# Altium PCB MotorBoard.PcbDoc (part 3 of 3)
Units mm, origin at the board's own origin, x right, y up, seen from the top; angles counter-clockwise.
Board outline 65.2 x 61.84 mm, 4 copper layers (Top Layer, Layer 1, Layer 2, Bottom Layer), stack 1.57 mm thick; 121 components, 73 nets, 432 pads, 165 vias.
Unrouted connection lines stored in the file: 1.
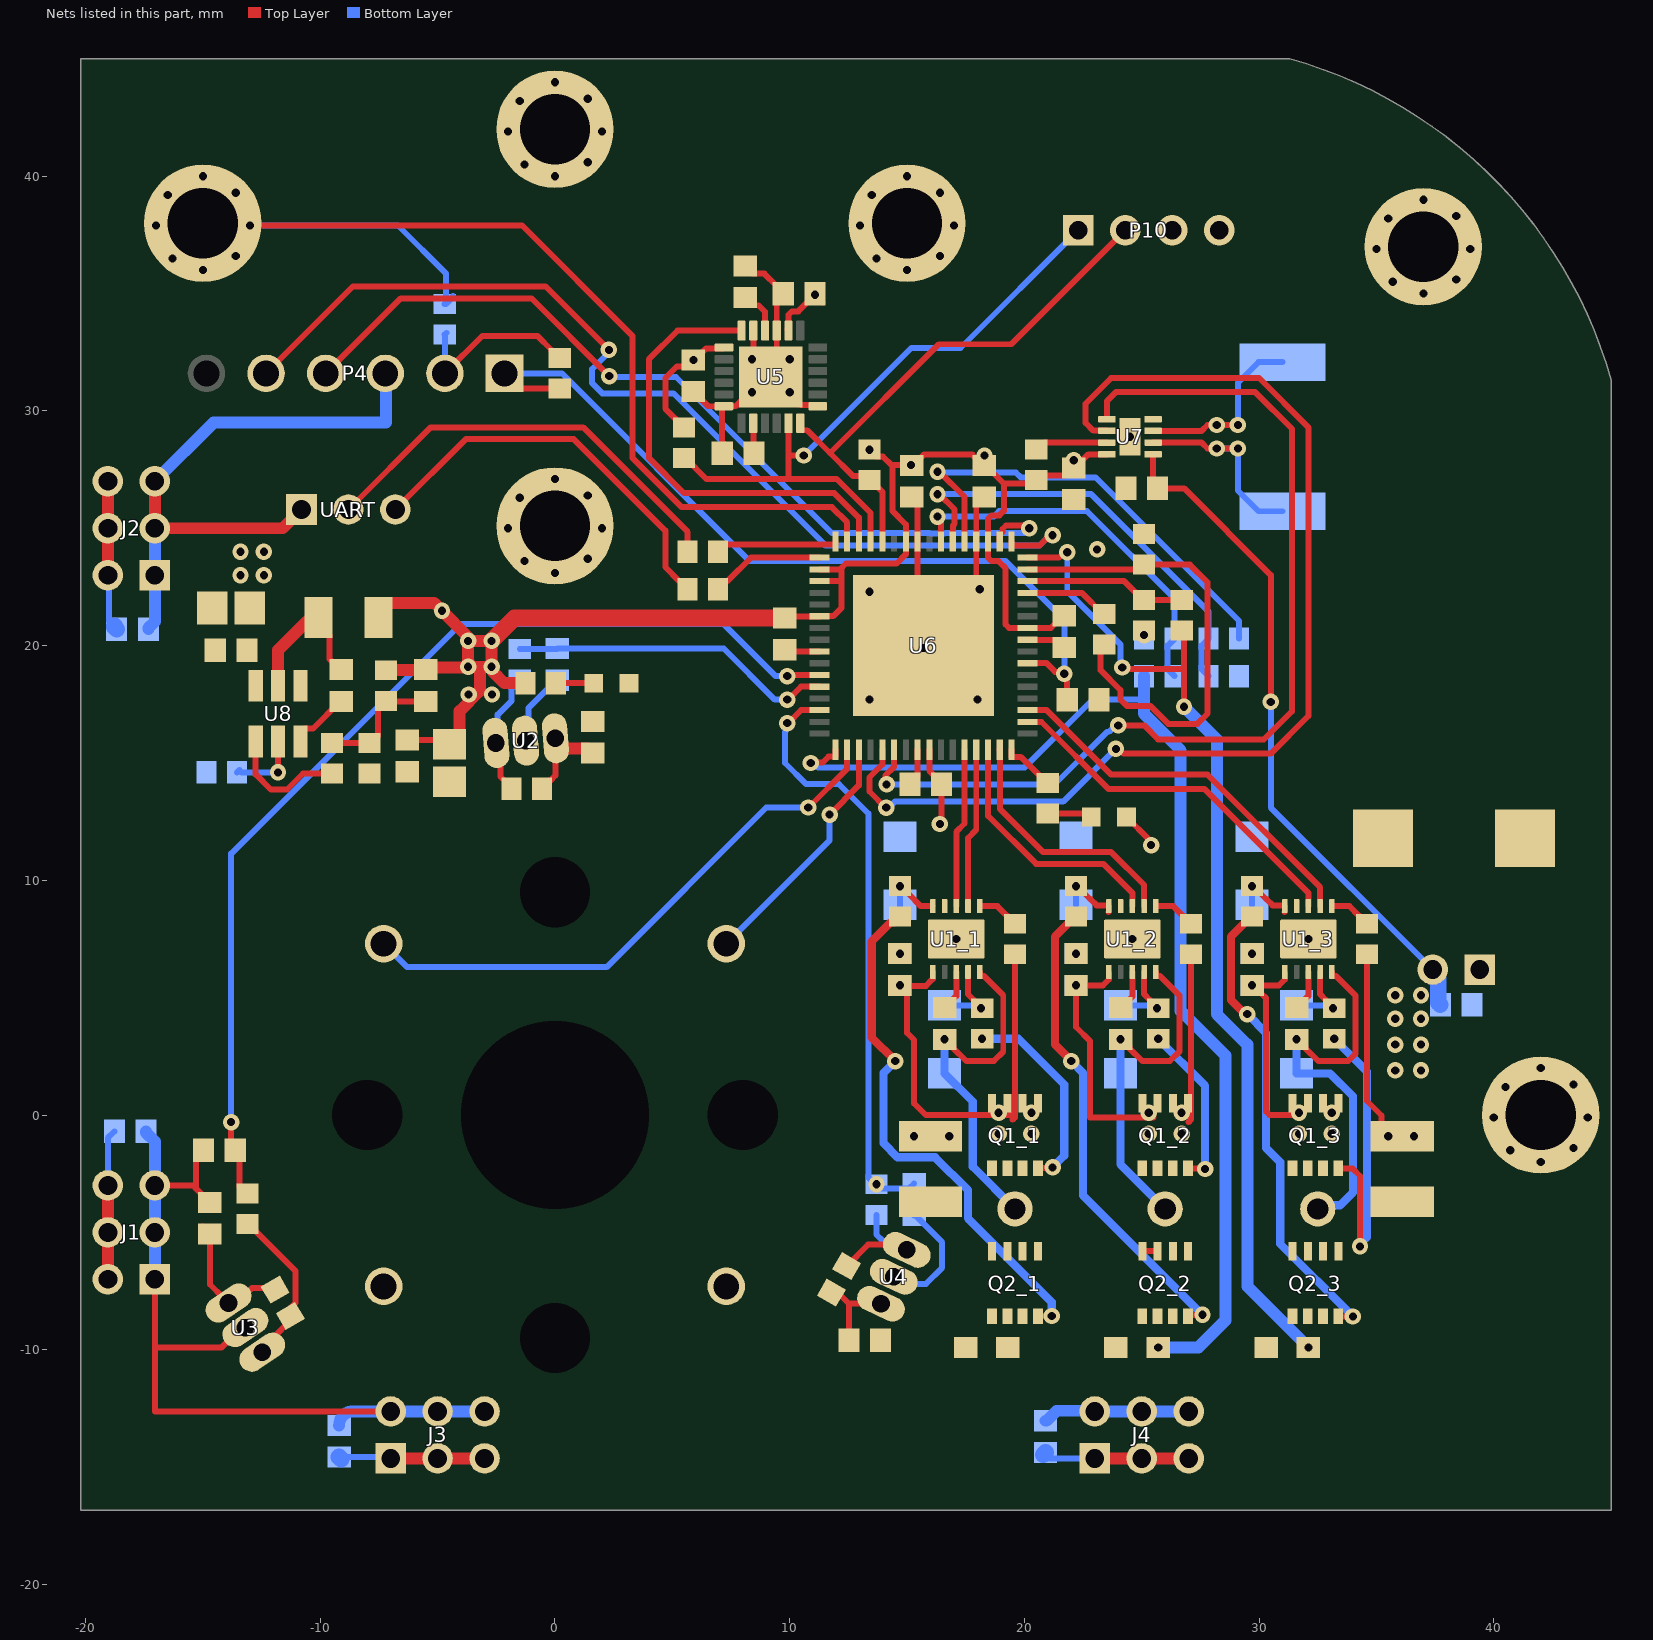
[diagram p4: the nets of this part, all layers, seen from the top]

## Via types
v1: diameter 0.7, hole 0.35, Top Layer to Bottom Layer, tented both sides, 96 vias
v2: diameter 0.7, hole 0.35, Top Layer to Bottom Layer, tented bottom, 66 vias
v3: diameter 0.7, hole 0.35, Top Layer to Bottom Layer, 3 vias

## Nets (pads, with @x,y where several pads share a name; then routed paths per layer and width w, separated by ;. In a path a pad name is that pad's centre, name@x,y a point inside that pad or via, vN(x,y) a via of type N, cw(c..) or ccw(c..) an arc to the next point about the centre after c; other vN are vias at no path point)
3V3: C3.1 C4.1 C5.1 C7.2 C8.2 C9.2 C20.1 C21.1 C22.1 C23.1 C24.1 C27.2 C31.2 C32.2 L1.2 P4.2 P8.1 P10.4 R4.2 R5.1 R6.1 R10.1 R11.2 R15.2 R16.2 R18.2 R22.2 R23.2 U2.1 U3.1 U4.1 U5.8 U5.13 U6.10 U6.19 U6.26 U6.34 U6.35 U6.38 U6.57 U7.8 | length 102.2
  Top Layer w0.254: C4.1@-15.024,-4.751 C4.1@-14.7,-5.075 ; C4.1@-14.65,-5.075 C4.1@-14.7,-5.075 ; U3.1@-14.155,-7.763 -14.7,-7.218 C4.1@-14.7,-5.075 ; U3.1@-13.908,-8.01 -13.549,-8.01 -12.917,-7.378 -11.984,-7.378 R5.1@-11.925,-7.437 ; C8.2@-6.3,15.975 -4.675,15.975 C9.2@-4.5,15.8 ; P4.2@-4.69,31.6 -3.09,33.2 -0.75,33.2 -0.148,32.598 -0.148,32.548 0.15,32.25 R11.2@0.2,32.25 ; R4.2@-0.55,13.9 -0.55,13.95 -0.252,14.248 -0.202,14.248 0.016,14.466 U2.1@0.016,16.05 ; R23.2@5.5,29.3 5.45,29.3 5.152,29.598 5.152,29.648 4.7,30.1 4.7,31.4 5.197,31.897 5.622,31.897 v1(5.9,32.175) 5.95,32.175 6.427,32.652 7.152,32.652 U5.13@7.2,32.7 ; C23.1@9.8,21.175 9.775,21.175 9.85,21.25 U6.38@11.265,21.25 11.268,21.253 11.853,21.253 12.2,21.6 12.2,22.8 ; U5.8@9.9,33.475 U5.8@9.95,33.425 9.95,34.097 10.099,34.246 10.371,34.246 v1(11.075,34.95) ; C32.2@11.075,35 v1(11.075,34.95) ; U6.35@11.265,22.75 12.15,22.75 12.2,22.8 ; U6.34@11.265,23.25 12.15,23.25 ; C32.2@11.398,34.627 v1(11.075,34.95) ; R6.1@11.775,-7.563 12.049,-7.563 12.525,-8.039 ; C5.1@12.525,-9.6 12.525,-8.039 ; v1(13.4,28.35) 13.698,28.052 13.975,28.052 14.327,27.7 v1(15.175,27.7) ; U4.1@13.892,-8.039 12.525,-8.039 ; 14.373,27.654 14.373,25.74 14.95,25.163 U6.26@14.95,24.435 14.947,24.432 14.947,23.886 14.561,23.5 12.4,23.5 12.15,23.25 ; C22.1@15.25,27.675 15.714,28.139 16.8,28.139 17.786,28.139 18.25,27.675 C20.1@18.3,27.675 ; U6.57@15.95,15.565 15.95,14.675 16.475,14.15 C24.1@16.475,14.1 16.475,12.4 v1(16.4,12.4) ; v1(18.3,28.1) C20.1@18.3,27.675 ; C20.1@18.35,27.675 C20.1@18.3,27.675 ; C21.1@21.7,21.275 21.65,21.275 21.125,20.75 U6.10@20.135,20.75 19.349,20.75 19.2,20.899 19.2,23.3 18.9,23.6 18.6,23.6 18.45,23.75 U6.19@18.45,24.435 18.45,25.399 18.599,25.548 18.935,25.548 19.127,25.74 19.127,26.91 ; v1(22.1,27.9) C27.2@22.1,27.575 ; U7.8@23.515,28.15 22.725,28.15 22.15,27.575 C27.2@22.1,27.575 ; P10.4@28.3,37.625 P10.4@28.3,37.7 ; 12.15,23.25 12.2,23.2 12.2,22.8 ; v1(15.175,27.7) 15.175,27.675 C22.1@15.2,27.675 v1(15.175,27.7) ; C20.1@18.3,27.675 18.623,27.352 18.685,27.352 19.127,26.91 ; 19.127,26.91 20.36,26.91 R15.2@20.5,27.05 20.702,27.252 21.727,27.252 22.05,27.575 C27.2@22.1,27.575
  Top Layer w0.508: L1.2@-7.525,21.2 -7.525,21.475 -7.179,21.821 -5.15,21.821 v1(-4.815,21.485) -3.737,20.407 -3.737,20.237 v1(-3.7,20.2) ; R18.2@-7.2,18.95 -7.188,18.962 -5.513,18.962 C7.2@-5.5,18.975 -5.412,19.063 -3.737,19.063 v1(-3.7,19.1) -3.2,19.1 ; C9.2@-4.5,15.8 -4.459,15.8 -4.063,16.196 -4.063,17.212 -3.2,18.075 -3.2,19.1 ; v1@-3.689,19.337 -3.7,19.337 v1(-3.7,20.2) ; R10.1@-1.25,18.4 -2.156,18.4 -2.663,18.907 -2.663,19.063 v1(-2.7,19.1) ; v1(-3.7,20.2) v1(-2.7,20.2) v1(-2.7,19.1) ; -3.2,19.1 v1(-2.7,19.1)
  Top Layer w0.512: U2.1@0.016,16.05 0.016,15.919 0.316,15.619 1.406,15.619 C3.1@1.6,15.425 ; C24.1@16.331,13.956 C24.1@16.475,14.1
  Top Layer w0.708: v1(-2.7,20.2) -1.725,21.175 C23.1@9.775,21.175
  Bottom Layer w0.254: P4.2@-4.815,31.475 P4.2@-4.69,31.6 -4.69,33.24 R16.2@-4.7,33.25 R16.2@-4.619,33.331
  other v1: -3.682,17.918 -2.682,17.918
A: P6.1 U6.51 | length 10.6
  Top Layer w0.254: v1(11.7,12.8) 12.95,14.05 U6.51@12.95,15.565
  Bottom Layer w0.254: P6.1@7.3,7.3 11.7,11.7 v1(11.7,12.8)
B: P9.1 U6.50 | length 24.5
  Top Layer w0.254: v1(10.795,13.102) 10.802,13.102 12.45,14.75 U6.50@12.45,15.565
  Bottom Layer w0.254: P9.1@-7.3,7.3 -6.3,6.3 2.2,6.3 9.002,13.102 v1(10.795,13.102)
BRAKE_SWITCH: pad.1@-15,38 R16.1 U6.31 | length 46.4
  Top Layer w0.254: pad.1@-13.123,38 -13.023,37.9 v2(-13,37.9) -8.3,37.9 -1.4,37.9 3.3,33.2 3.3,28 5.4,25.9 11.8,25.9 12.447,25.253 12.447,24.438 U6.31@12.45,24.435
  Bottom Layer w0.254: pad.1@-13.123,38 -13.023,37.9 -8.3,37.9 -6.686,37.9 -4.65,35.864 -4.65,34.55 -4.352,34.848 -4.352,34.898 R16.1@-4.7,34.55
  other v2: -15,36 -16.3,36.5 -13.6,36.6 -17,37.9 -16.5,39.2 -13.6,39.3 -15,40
Bridge_Out1: C2_1.1 D3_1.1 P1.1 Q1_1.1 Q1_1.2 Q1_1.3 Q2_1.5 Q2_1.6 Q2_1.7 Q2_1.8 U1_1.5 | length 15.5
  Top Layer w0.254: v1(16.6,3.225) 16.65,3.225 16.973,2.902 16.973,2.852 17.525,2.3 18.7,2.3 19.1,2.7 19.1,5.1 18.273,5.927 18.107,5.927 18.1,5.934 U1_1.5@18.1,6.1
  Bottom Layer w0.35: v1(16.6,3.225) D3_1.1@16.6,1.775 17.8,0.575 17.8,-2.2 P1.1@19.6,-4
Bridge_Out2: C2_2.1 D3_2.1 P2.1 Q1_2.1 Q1_2.2 Q1_2.3 Q2_2.5 Q2_2.6 Q2_2.7 Q2_2.8 U1_2.5 | length 15.7
  Top Layer w0.254: v1(24.1,3.225) 24.15,3.225 24.473,2.902 24.473,2.852 25.025,2.3 26.2,2.3 26.6,2.7 26.6,5.1 25.773,5.927 25.607,5.927 25.6,5.934 U1_2.5@25.6,6.1 ; Q2_2.8@25.025,-5.8 Q2_2.7@25.675,-5.8
  Bottom Layer w0.35: v1(24.1,3.225) 24.1,-2.1 P2.1@26,-4
Bridge_Out3: C2_3.1 D3_3.1 P3.1 Q1_3.1 Q1_3.2 Q1_3.3 Q2_3.5 Q2_3.6 Q2_3.7 Q2_3.8 U1_3.5 | length 17.1
  Top Layer w0.254: v1(31.6,3.225) 31.65,3.225 31.973,2.902 31.973,2.852 32.525,2.3 33.8,2.3 34.1,2.6 34.1,5.1 33.273,5.927 33.107,5.927 33.1,5.934 U1_3.5@33.1,6.1
  Bottom Layer w0.35: D3_3.1@31.6,1.775 33.025,1.775 34,0.8 34,-3.3 33.452,-3.848 32.652,-3.848 P3.1@32.5,-4 ; D3_3.1@31.6,1.9 v1(31.6,3.225)
DEBUG_LED: R28.1 U6.64 | length 2.3
  Top Layer w0.254: U6.64@19.45,15.565 19.45,15.265 19.453,15.262 19.838,15.262 20.95,14.15 R28.1@21,14.15
GND: C1_1.1 C1_2.1 C1_3.1 C3.2 C4.2 C5.2 C8.1 C9.1 C10.1 C11.1 C12.1 C13.1 C14.2 C15.2 C16.2 C17_1.1 C17_2.1 C17_3.1 C18.1 C20.2 C21.2 C22.2 C23.2 C24.2 C25.2 C26.2 C27.1 C28.2 C29.1 C30.2 C31.1 C32.1 C33.2 C34.2 C35.1 C36.1 D1.2 D2.2 D4_1.1 D4_2.1 D4_3.1 J1.1 J1.3 J1.5 J2.1 J2.3 J2.5 J3.2 J3.4 J3.6 J4.2 J4.4 J4.6 P4.3 P5.1 P7.1 P10.3 pad.1@0,25.1 pad.1@0,42 pad.1@15,38 pad.1@37,37 pad.1@42,0 R7_1.1 R7_2.1 R7_3.1 R8.1 R21.1 R27.1 R33.1 R35.1 U1_1.9 U1_1.11 U1_2.9 U1_2.11 U1_3.9 U1_3.11 U2.2 U3.2 U4.2 U5.1 U5.9 U5.11 U5.18 U5.25 U6.9 U6.20 U6.25 U6.41 U6.56 U6.65 U7.4 U7.9 U8.1 UART.1 | length 119.5
  Top Layer w0.254: J1.1@-17.05,-7 -17.05,-9.9 ; J1.5@-17.05,-3 -17.048,-3.002 -15.423,-3.002 -15.298,-3.127 ; C35.1@-14.975,-1.5 -15.298,-1.823 -15.298,-3.127 ; C4.2@-14.7,-3.725 -14.75,-3.725 -15.073,-3.402 -15.073,-3.352 -15.298,-3.127 ; U3.2@-13.189,-9.057 -13.357,-9.057 -14.2,-9.9 -17.05,-9.9 ; J3.2@-7,-12.63 -17.05,-12.63 -17.05,-9.9 ; C31.1@5.9,30.825 5.95,30.825 6.273,30.502 6.273,30.452 6.525,30.2 U5.18@7.173,30.2 ; C34.2@7.125,28.2 7.125,30.152 U5.18@7.173,30.2 ; C33.2@8.1,36.175 8.423,35.852 8.923,35.852 9.45,35.325 C32.1@9.45,34.725 ; U5.11@8.45,33.425 8.45,31.45 U5.25@9.2,31.45 ; C32.1@9.725,35 C32.1@9.45,34.725 ; C23.2@9.8,19.825 9.875,19.75 U6.41@11.265,19.75 ; U5.1@11.2,30.2 11.152,30.248 10.452,30.248 U5.25@9.25,31.45 ; C24.2@15.125,14.1 15.448,14.423 15.448,15.563 U6.56@15.45,15.565 ; C22.2@15.2,26.325 15.45,26.075 15.45,20 U6.65@15.7,20 17.95,22.25 U6.20@17.95,24.435 17.95,26.002 18.273,26.325 C20.2@18.3,26.325 ; U6.9@20.135,20.25 20.137,20.248 21.377,20.248 C21.2@21.7,19.925 ; D1.2@24.35,12.7 25.315,11.735 25.315,11.585 v1(25.4,11.5) ; J4.6@27,-12.63 J4.6@27.16,-12.79 ; U5.18@7.173,30.2 7.221,30.248 7.248,30.248 U5.18@7.2,30.2 7.7,30.2 8.738,31.238 cw(c9.25,30.726) U5.25@9.25,31.45 ; U5.25@9.2,31.45 9.45,31.7 U5.9@9.45,33.425 C32.1@9.45,34.725 ; U5.25@9.2,31.45 U5.25@9.25,31.45
  Top Layer w0.508: J2.5@-17.05,27 J2.3@-17.05,25 -11.6,25 UART.1@-10.8,25.8
  Top Layer w0.712: J4.6@27.16,-12.79 J4.6@27.16,-12.47
  Bottom Layer w0.254: U2.2@-1.25,15.951 -1.136,16.065 -1.136,17.339 0.05,18.525 C11.1@0.1,18.525 ; U4.2@14.439,-6.893 14.746,-7.2 15.8,-7.2 16.5,-6.5 16.5,-5.425 15.35,-4.275 C36.1@15.3,-4.275 ; v2(15,36) 15,36.021 pad.1@15.102,36.123 ; R35.1@25.1,20.3 v1(25.1,20.45)
  Bottom Layer w0.508: C10.1@-17.425,-0.7 -17.425,-0.75 -17.05,-1.125 J1.5@-17.05,-3 J1.3@-17.05,-5 J1.1@-17.05,-7 ; C16.2@-17.325,20.7 -17.325,20.75 -17.05,21.025 J2.1@-17.05,23 J2.3@-17.05,25 J2.5@-17.05,27 -14.55,29.5 -7.2,29.5 ; C12.1@-9.2,-13.225 cw(c-8.605,-13.225) -8.605,-12.63 J3.2@-7,-12.63 J3.4@-5,-12.63 J3.6@-3,-12.63 J3.6@-2.801,-12.63 ; -7.2,29.6 P4.3@-7.2,32.03 ; C14.2@20.9,-13.025 20.95,-13.025 21.375,-12.6 22.97,-12.6 J4.2@23,-12.63 J4.4@25,-12.63 J4.6@27,-12.63
  other v1: 23.1,24.1 24.5,28.9
  other v2: 42,-2 40.7,-1.5 43.4,-1.4 40,-0.1 44,-0.1 40.5,1.2 43.4,1.3 42,2 14.7,6.875 22.2,6.875 29.7,6.875 17.1,7.5 24.6,7.5 32.1,7.5 13.4,17.7 18,17.7 15.7,19.9 13.4,22.3 18.1,22.4 0,23.1 -1.3,23.6 1.4,23.7 -2,25 2,25 -1.5,26.3 1.4,26.4 0,27.1 8.4,30.8 10,30.8 8.4,32.2 10,32.2 37,35 35.7,35.5 38.4,35.6 13.7,36.5 16.4,36.6 35,36.9 39,36.9 13,37.9 17,37.9 35.5,38.2 38.4,38.3 37,39 13.5,39.2 16.4,39.3 0,40 15,40 -1.3,40.5 1.4,40.6 -2,41.9 2,41.9 -1.5,43.2 1.4,43.3 0,44
HALL_OUT1: C11.2 R24.2 U6.44 | length 13.9
  Top Layer w0.254: v1(9.9,17.7) 9.934,17.7 10.484,18.25 U6.44@11.265,18.25
  Bottom Layer w0.254: R24.2@-1.5,19.85 0.075,19.85 C11.2@0.1,19.875 7.191,19.875 9.366,17.7 v1(9.9,17.7)
HALL_OUT2: C35.2 R25.2 U6.43 | length 44.9
  Top Layer w0.254: v1(-13.8,-0.3) -13.8,-1.325 -13.448,-1.677 -13.448,-3.052 -13.15,-3.35 R25.2@-13.1,-3.35 ; v1(9.9,18.7) 9.947,18.747 11.262,18.747 U6.43@11.265,18.75
  Bottom Layer w0.254: v1(-13.8,-0.3) -13.8,11.134 -4.003,20.931 7.169,20.931 9.4,18.7 v1(9.9,18.7)
HALL_OUT3: C36.2 R26.2 U6.46 | length 25.5
  Top Layer w0.254: v1(9.9,16.7) 9.934,16.7 10.484,17.25 U6.46@11.265,17.25
  Bottom Layer w0.254: v1(9.9,16.7) 9.815,16.615 9.815,16.343 9.8,16.328 9.8,15 10.7,14.1 12.1,14.1 13.352,12.848 13.352,-2.652 13.65,-2.95 v1(13.7,-2.95) 13.875,-3.125 15.1,-3.125 C36.2@15.3,-2.925
I_SENSE1: Q2_1.1 Q2_1.2 Q2_1.3 R7_1.2
I_SENSE2: Q2_2.1 Q2_2.2 Q2_2.3 R7_2.2 R34.1 U6.49 | length 49.1
  Top Layer w0.254: v1(10.9,15) 10.92,15.02 11.405,15.02 11.655,15.27 11.947,15.27 11.95,15.273 U6.49@11.95,15.565
  Bottom Layer w0.254: v1(10.9,15) 11.021,15 11.204,14.816 20.016,14.816 22.9,17.7 25.1,17.7
  Bottom Layer w0.512: R34.1@25.1,18.7 25.1,17.7 25.1,17.1 26.66,15.54 26.66,4.44 28.56,2.54 28.56,-8.756 27.416,-9.9 v1(25.7,-9.9)
I_SENSE3: Q2_3.1 Q2_3.2 Q2_3.3 R7_3.2 R17.1 U6.16 | length 43.2
  Top Layer w0.254: U6.16@20.135,23.75 21.475,23.75 21.706,23.981 v1(21.827,23.981) ; v1(24.167,19.067) 24.234,19 26.8,19 ; R17.1@26.7,20.65 26.6,20.55 26.8,20.35 26.8,19 ; v1(26.8,17.4) 26.8,19
  Bottom Layer w0.254: v1(21.827,23.981) 21.827,22.317 24.1,20.044 24.1,19.134 v1(24.167,19.067)
  Bottom Layer w0.512: v1(26.8,17.4) 28.2,16 28.2,4.3 29.5,3 29.5,-7.3 v1(32.1,-9.9)
INT: U5.12 U6.30 | length 19.7
  Top Layer w0.254: U5.12@7.95,33.425 5.225,33.425 4,32.2 4,28 5.5,26.5 11.9,26.5 12.947,25.453 12.947,24.438 U6.30@12.95,24.435
MCLR: C25.1 P4.1 R11.1 U6.7 | length 36
  Top Layer w0.254: P4.1@-2.15,31.6 -1.5,30.95 R11.1@0.2,30.95 ; U6.7@20.135,19.25 20.946,19.25 21.311,18.885 21.615,18.885 v1(21.7,18.8) 21.7,18.679 21.825,18.554 C25.1@21.825,17.7
  Bottom Layer w0.254: P4.1@-2.15,31.6 0.3,31.6 8.3,23.6 19.2,23.6 21.7,21.1 v1(21.7,18.8)
NetC2_1_2: C2_1.2 U1_1.3 | length 1.8
  Top Layer w0.254: C2_1.2@16.6,4.575 16.65,4.575 16.973,4.898 16.973,4.948 17.1,5.075 U1_1.3@17.1,6.1
NetC2_2_2: C2_2.2 U1_2.3 | length 1.7
  Top Layer w0.254: C2_2.2@24.1,4.575 24.169,4.644 24.197,4.644 24.6,5.047 U1_2.3@24.6,6.1
NetC2_3_2: C2_3.2 U1_3.3 | length 1.8
  Top Layer w0.254: C2_3.2@31.6,4.575 31.65,4.575 31.973,4.898 31.973,4.948 32.1,5.075 U1_3.3@32.1,6.1
NetC6_1: C6.1 L1.1 U8.2 | length 6.8
  Top Layer w0.254: L1.1@-10.548,21.052 -10.319,21.281 -10.156,21.281 L1.1@-10.075,21.2 -10.19,21.2 L1.1@-10.27,21.12 ; L1.1@-10.348,21.042 -10.192,21.042 -9.602,20.452 -9.602,19.427 -9.15,18.975 C6.1@-9.1,18.975
  Top Layer w0.512: U8.2@-11.8,18.285 -11.8,19.804 -10.552,21.052 L1.1@-10.548,21.052
NetC6_2: C6.2 U8.6 | length 2.7
  Top Layer w0.254: U8.6@-10.85,15.915 -10.85,16.29 -10.677,16.463 -10.312,16.463 -9.15,17.625 C6.2@-9.1,17.625
NetC7_1: C7.1 R18.1 R20.2 R21.2 | length 5.5
  Top Layer w0.254: R20.2@-9.5,15.85 -7.85,15.85 -7.548,16.152 -7.548,17.352 -7.25,17.65 R18.1@-7.2,17.65 -7.175,17.625 C7.1@-5.5,17.625
NetC33_1: C33.1 U5.10 | length 1.9
  Top Layer w0.254: C33.1@8.1,34.825 8.423,34.502 8.673,34.502 8.95,34.225 U5.10@8.95,33.425
NetC34_1: C34.1 U5.20 | length 1.3
  Top Layer w0.254: U5.20@8.45,29.475 8.45,28.225 C34.1@8.475,28.2
NetD1_1: D1.1 R28.2 | length 1.9
  Top Layer w0.254: R28.2@21,12.85 22.7,12.85 D1.1@22.85,12.7
NetD2_1: D2.1 R10.2 | length 1.6
  Top Layer w0.254: R10.2@0.05,18.4 D2.1@1.65,18.4
NetD3_1_2: D3_1.2 R2_1.1 U1_1.4 | length 3.4
  Top Layer w0.254: U1_1.4@17.6,6.1 17.6,5.15 17.852,4.898 17.852,4.848 v1(18.15,4.55) R2_1.1@18.2,4.55
  Bottom Layer w0.254: D3_1.2@16.6,4.675 17.904,4.675 18.029,4.55 v1(18.15,4.55)
NetD3_2_2: D3_2.2 R2_2.1 U1_2.4 | length 3.4
  Top Layer w0.254: U1_2.4@25.1,6.1 25.1,5.15 25.352,4.898 25.352,4.848 v1(25.65,4.55) R2_2.1@25.7,4.55
  Bottom Layer w0.254: D3_2.2@24.1,4.675 25.404,4.675 25.529,4.55 v1(25.65,4.55)
NetD3_3_2: D3_3.2 R2_3.1 U1_3.4 | length 3.4
  Top Layer w0.254: U1_3.4@32.6,6.1 32.6,5.15 32.852,4.898 32.852,4.848 v1(33.15,4.55) R2_3.1@33.2,4.55
  Bottom Layer w0.254: D3_3.2@31.6,4.675 32.904,4.675 33.029,4.55 v1(33.15,4.55)
NetD4_1_2: D4_1.2 R3_1.1 U1_1.10 | length 2.7
  Top Layer w0.254: v3(14.7,9.75) 14.75,9.75 15.048,9.452 15.048,9.437 15.585,8.9 U1_1.10@16.093,8.9
  Bottom Layer w0.254: D4_1.2@14.7,8.85 v3(14.7,9.75)
NetD4_2_2: D4_2.2 R3_2.1 U1_2.10 | length 2.9
  Top Layer w0.254: R3_2.1@22.15,9.75 v3(22.2,9.75) 22.25,9.75 22.798,9.202 22.812,9.202 23.079,8.935 23.6,8.935 23.6,8.665 U1_2.10@23.587,8.652
  Bottom Layer w0.254: D4_2.2@22.2,8.95 v3(22.2,9.75)
NetD4_3_2: D4_3.2 R3_3.1 U1_3.10 | length 2.9
  Top Layer w0.254: R3_3.1@29.65,9.75 v3(29.7,9.75) 29.75,9.75 30.298,9.202 30.312,9.202 30.579,8.935 31.1,8.935 31.1,8.665 U1_3.10@31.087,8.652
  Bottom Layer w0.254: D4_3.2@29.7,8.95 v3(29.7,9.75)
NetQ1_1_4: Q1_1.4 R2_1.2 | length 8.7
  Top Layer w0.254: Q1_1.4@20.575,-2.27 20.594,-2.251 21.181,-2.251 v1(21.2,-2.232)
  Bottom Layer w0.35: v1(18.2,3.25) 19.75,3.25 21.7,1.3 21.7,-1.732 v1(21.2,-2.232)
NetQ1_2_4: Q1_2.4 R2_2.2 | length 7.1
  Top Layer w0.254: Q1_2.4@26.975,-2.27 26.99,-2.285 27.685,-2.285 v1(27.7,-2.3)
  Bottom Layer w0.35: v1(25.7,3.25) 27.7,1.25 v1(27.7,-2.3)
NetQ1_3_4: Q1_3.4 R2_3.2 | length 13.6
  Top Layer w0.254: Q1_3.4@33.375,-2.27 33.39,-2.285 33.985,-2.285 34.3,-2.6 v1(34.3,-5.6)
  Bottom Layer w0.35: v1(33.2,3.25) 34.6,1.85 34.6,-5.205 34.3,-5.505 v1(34.3,-5.6)
NetQ2_1_4: Q2_1.4 R3_1.2 | length 22.7
  Top Layer w0.254: Q2_1.4@20.575,-8.57 20.579,-8.566 21.158,-8.566 v1(21.162,-8.562)
  Top Layer w0.35: v1(14.5,2.3) 13.495,3.305 13.495,7.395 14.3,8.2 14.45,8.2 R3_1.2@14.7,8.45
  Bottom Layer w0.35: v1(14.5,2.3) 14,1.8 14,-1.2 14.6,-1.8 16.2,-1.8 17.6,-3.2 17.6,-4.4 21.162,-7.962 v1(21.162,-8.562)
NetQ2_2_4: Q2_2.4 R3_2.2 | length 20.6
  Top Layer w0.254: Q2_2.4@26.975,-8.57 27.033,-8.512 v1(27.588,-8.512)
  Top Layer w0.35: v1(22,2.3) 21.3,3 21.3,7.6 22.15,8.45 R3_2.2@22.2,8.45
  Bottom Layer w0.35: v1(22,2.3) 22.5,1.8 22.5,-3.423 v1(27.588,-8.512)
NetQ2_3_4: Q2_3.4 R3_3.2 | length 20.4
  Top Layer w0.254: Q2_3.4@33.375,-8.57 33.382,-8.578 34.078,-8.578 v1@34.085,-8.585
  Top Layer w0.35: v1(29.5,4.3) 29.405,4.3 29.23,4.475 29.225,4.475 28.8,4.9 28.8,7.6 29.65,8.45 R3_3.2@29.7,8.45
  Bottom Layer w0.35: v1(29.5,4.3) 30.3,3.5 30.3,-1.4 30.9,-2 30.9,-5.485 v1(34,-8.585)
NetR1_1_2: R1_1.2 U1_1.6 | length 1.8
  Top Layer w0.254: U1_1.6@18.1,8.9 18.85,8.9 19.252,8.498 19.252,8.448 19.55,8.15 R1_1.2@19.6,8.15
NetR1_2_2: R1_2.2 U1_2.6 | length 1.8
  Top Layer w0.254: U1_2.6@25.6,8.9 26.35,8.9 26.752,8.498 26.752,8.448 27.05,8.15 R1_2.2@27.1,8.15
NetR1_3_2: R1_3.2 U1_3.6 | length 1.8
  Top Layer w0.254: U1_3.6@33.1,8.9 33.85,8.9 34.252,8.498 34.252,8.448 34.55,8.15 R1_3.2@34.6,8.15
NetR4_1: R4.1 R24.1 U2.3 | length 5.4
  Top Layer w0.254: U2.3@-2.516,15.852 -2.318,15.654 -2.318,14.418 -1.85,13.95 R4.1@-1.85,13.9
  Bottom Layer w0.254: U2.3@-2.516,15.852 -2.443,15.925 -2.443,17.057 -1.848,17.652 -1.848,18.252 -1.55,18.55 R24.1@-1.5,18.55
NetR5_2: R5.2 R25.1 U3.3 | length 6.9
  Top Layer w0.254: R25.1@-13.1,-4.65 -13.05,-4.65 -11.047,-6.653 -11.047,-8.003 -11.275,-8.231 -11.275,-8.754 -11.983,-9.462 -11.983,-9.617 U3.3@-12.47,-10.104
NetR6_2: R6.2 R26.1 U4.3 | length 5.6
  Top Layer w0.254: R6.2@12.535,-6.547 R6.2@12.425,-6.437 13.345,-5.517 14.756,-5.517 U4.3@14.986,-5.747
  Bottom Layer w0.254: R26.1@13.7,-4.25 13.7,-5.1 13.96,-5.36 14.599,-5.36 U4.3@14.986,-5.747
NetR12_1: R12.1 UART.3 | length 17.3
  Top Layer w0.254: UART.3@-6.8,25.8 -3.8,28.8 0.8,28.8 4.7,24.9 4.7,23.35 5.302,22.748 5.352,22.748 5.65,22.45 R12.1@5.65,22.4
NetR13_1: R13.1 UART.2 | length 18.6
  Top Layer w0.254: UART.2@-8.8,25.8 -5.3,29.3 1.2,29.3 5.65,24.85 R13.1@5.65,24
NetR14_1: R14.1 U7.2 | length 8.9
  Top Layer w0.254: U7.2@25.485,28.65 27.55,28.65 27.8,28.4 v1(28.2,28.4) v1@29.2,28.4
  Bottom Layer w0.254: v1(28.2,28.4) 29.2,28.4 v1@29.185,28.385 ; v1(29.1,28.4) 29.1,26.6 29.975,25.725 R14.1@31,25.725
NetR14_2: R14.2 U7.3 | length 8.7
  Top Layer w0.254: U7.3@25.485,29.15 27.55,29.15 27.8,29.4 v1(28.2,29.4) v1(29.1,29.4)
  Bottom Layer w0.254: v1(28.2,29.4) v1(29.1,29.4) 29.1,31.2 29.975,32.075 R14.2@31,32.075
NetR15_1: R15.1 U7.7 | length 3.1
  Top Layer w0.254: R15.1@20.5,28.35 20.55,28.35 20.85,28.65 U7.7@23.515,28.65
NetR19_1: R19.1 U8.5 | length 3.1
  Top Layer w0.254: v1(-11.8,14.6) U8.5@-11.8,15.915
  Bottom Layer w0.254: R19.1@-13.55,14.6 -13.45,14.7 -13.35,14.6 v1(-11.8,14.6)
NetR20_1: R20.1 U8.4 | length 5.2
  Top Layer w0.254: U8.4@-12.75,15.915 -12.75,14.516 -12.103,13.869 -11.416,13.869 -10.735,14.55 R20.1@-9.5,14.55
NetU6_53: U6.53 U7.6 | length 47.8
  Top Layer w0.254: U6.53@13.95,15.565 13.947,15.562 13.947,14.935 13.4,14.388 13.4,13.783 14.083,13.1 v1(14.113,13.1) ; U7.6@23.515,29.15 23.502,29.163 22.937,29.163 22.605,29.495 22.605,30.305 23.7,31.4 30,31.4 32.1,29.3 32.1,17 30.5,15.4 24.221,15.4 24.021,15.6 v1(23.9,15.6)
  Bottom Layer w0.254: v1(14.113,13.1) 14.23,13.1 14.485,13.354 21.654,13.354 v1(23.9,15.6)
NetU6_54: U6.54 U7.5 | length 42.2
  Top Layer w0.254: v1(14.131,14.085) 14.085,14.131 14.085,14.47 14.45,14.834 U6.54@14.45,15.565 ; U7.5@23.515,29.65 23.515,30.415 23.9,30.8 29.834,30.8 31.4,29.234 31.4,17.2 30.2,16 25.7,16 25.1,16.6 v1(24,16.6)
  Bottom Layer w0.254: v1(14.131,14.085) 21.285,14.085 23.531,16.331 23.61,16.331 23.879,16.6 v1(24,16.6)
OA2IN+: R17.2 R27.2 U6.14 | length 6.9
  Top Layer w0.254: U6.14@20.135,22.75 24.25,22.75 25.05,21.95 R27.2@25.1,21.95 R17.2@26.7,21.95
OA2IN-: R8.2 R9.1 U6.15 | length 20.7
  Top Layer w0.254: U6.15@20.135,23.25 24.9,23.25 R8.2@25.1,23.45 27.05,23.45 27.8,22.7 27.8,17.1 27.369,16.669 26.131,16.669 25.369,17.431 24.369,17.431 24.093,17.707 24.093,18.107 23.249,18.951 23.249,19.899 R9.1@23.4,20.05
OA2OUT: R9.2 U6.13 | length 3.6
  Top Layer w0.254: U6.13@20.135,22.25 22.45,22.25 23.35,21.35 R9.2@23.4,21.35
OA3IN+: R34.2 R35.2 U6.23 | length 16.4
  Top Layer w0.254: v1(16.3,25.5) 16.3,25.379 16.45,25.229 U6.23@16.45,24.435
  Bottom Layer w0.254: v1(16.3,25.5) 18.696,25.5 18.927,25.731 22.669,25.731 26.4,22 R35.2@26.4,20.3 26.102,20.002 26.102,18.998 R34.2@26.4,18.7
OA3IN-: R32.1 R33.2 U6.22 | length 19
  Top Layer w0.254: v1(16.3,26.454) 16.38,26.454 17.031,25.803 17.031,25.197 16.95,25.116 U6.22@16.95,24.435
  Bottom Layer w0.254: v1(16.3,26.454) 22.846,26.454 27.85,21.45 R32.1@27.85,20.3 27.552,20.002 27.552,18.998 R33.2@27.85,18.7
OA3OUT: R32.2 U6.21 | length 19.7
  Top Layer w0.254: v1(16.3,27.408) 16.38,27.408 17.45,26.338 U6.21@17.45,24.435
  Bottom Layer w0.254: v1(16.3,27.408) 16.339,27.369 19.645,27.369 19.845,27.169 23.031,27.169 29.15,21.05 R32.2@29.15,20.3
PGC: P4.5 U6.17 | length 43.7
  Top Layer w0.254: P4.5@-12.31,31.6 -8.61,35.3 -0.4,35.3 v1(2.3,32.6) ; U6.17@19.45,24.435 19.45,24.272 19.453,24.269 20.648,24.269 21.079,24.7 v1(21.2,24.7)
  Bottom Layer w0.254: v1(2.3,32.6) 2.3,32.5 1.586,31.786 1.586,31.18 2.014,30.752 5.048,30.752 11.531,24.269 20.648,24.269 21.079,24.7 v1(21.2,24.7)
PGD: P4.4 U6.18 | length 37.4
  Top Layer w0.254: P4.4@-9.77,31.6 -6.57,34.8 -1,34.8 v1(2.317,31.483) ; U6.18@18.95,24.435 18.95,24.735 19.066,24.851 19.066,24.97 19.215,25.119 20.06,25.119 20.179,25 v1(20.209,25)
  Bottom Layer w0.254: v1(2.317,31.483) 2.356,31.444 5.156,31.444 11.8,24.8 15.966,24.8 15.997,24.769 16.603,24.769 16.634,24.8 19.979,24.8 20.179,25 v1(20.209,25)
PWMH1: U1_1.8 U6.60 | length 6.8
  Top Layer w0.254: U1_1.8@17.1,8.9 17.1,12.069 17.45,12.419 U6.60@17.45,15.565
PWMH2: U1_2.8 U6.62 | length 10.9
  Top Layer w0.254: U6.62@18.45,15.565 18.453,15.562 18.453,12.747 20.5,10.7 23.367,10.7 24.6,9.467 U1_2.8@24.6,8.9
PWMH3: U1_3.8 U6.2 | length 15.5
  Top Layer w0.254: U6.2@20.135,16.75 20.138,16.747 20.73,16.747 23.577,13.9 27.667,13.9 32.1,9.467 U1_3.8@32.1,8.9
PWML1: U1_1.7 U6.61 | length 6.8
  Top Layer w0.254: U1_1.7@17.6,8.9 17.6,11.8 17.95,12.15 U6.61@17.95,15.565
PWML2: U1_2.7 U6.63 | length 10.9
  Top Layer w0.254: U6.63@18.95,15.565 18.953,15.562 18.953,13.047 20.8,11.2 23.7,11.2 25.1,9.8 U1_2.7@25.1,8.9
PWML3: U1_3.7 U6.3 | length 16.4
  Top Layer w0.254: U6.3@20.135,17.25 20.95,17.25 23,15.2 23.7,14.5 27.8,14.5 32.6,9.7 U1_3.7@32.6,8.9
RX: R13.2 U6.32 | length 5.3
  Top Layer w0.254: R13.2@6.95,24 6.95,24.016 7.248,24.314 11.947,24.314 11.95,24.317 U6.32@11.95,24.435
SCL: P10.1 R23.1 U5.23 U6.29 | length 28.9
  Top Layer w0.254: R23.1@5.5,28 5.55,28 6.45,27.1 10,27.1 ; U5.23@9.95,29.475 9.95,28.1 ; v1(10.6,28.1) 9.95,28.1 ; U6.29@13.45,24.435 13.447,24.438 13.447,25.653 12,27.1 10,27.1 ; 9.95,28.1 9.95,27.15 10,27.1
  Bottom Layer w0.254: v1(10.6,28.1) 15.181,32.681 17.281,32.681 P10.1@22.3,37.7
SDA: P10.2 R22.1 U5.24 U6.28 | length 23.4
  Top Layer w0.254: U5.24@10.45,29.475 10.45,29.225 10.498,29.177 10.748,29.177 11.72,28.205 ; R22.1@13.4,27.05 13.218,27.232 12.693,27.232 11.72,28.205 ; R22.1@13.45,27.05 13.95,26.55 U6.28@13.95,24.435 ; P10.2@24.3,37.7 19.441,32.841 16.357,32.841 11.72,28.205
TX: R12.2 U6.33 | length 4.8
  Top Layer w0.254: R12.2@7,22.45 7,22.5 7.248,22.748 7.348,22.748 8.35,23.75 11.259,23.75 11.262,23.747 U6.33@11.265,23.75
VBAT: C1_1.2 C1_2.2 C1_3.2 C10.2 C12.2 C13.2 C14.1 C15.1 C16.1 C17_1.2 C17_2.2 C17_3.2 C18.2 C26.1 C28.1 C29.2 C30.1 J1.2 J1.4 J1.6 J2.2 J2.4 J2.6 J3.1 J3.3 J3.5 J4.1 J4.3 J4.5 P5.2 Q1_1.5 Q1_1.6 Q1_1.7 Q1_1.8 Q1_2.5 Q1_2.6 Q1_2.7 Q1_2.8 Q1_3.5 Q1_3.6 Q1_3.7 Q1_3.8 R1_1.1 R1_2.1 R1_3.1 R19.2 U1_1.1 U1_2.1 U1_3.1 U7.1 U8.3 | length 108.7
  Top Layer w0.254: U1_1.1@16.1,6.1 16.1,5.8 15.8,5.5 14.725,5.5 15,5.225 15,3.5 15.3,3.2 15.3,0.5 15.8,0 19.6,0 ; 19.5,-0.2 19.6,-0.1 19.6,0 ; R1_1.1@19.6,6.85 19.6,0 ; U1_2.1@23.6,6.065 23.6,5.775 23.35,5.525 v2(22.2,5.525) 22.2,3.751 22.8,3.151 22.8,-0.1 v1@25.5,-0.1 ; U7.1@25.485,28.15 25.485,26.89 C28.1@25.675,26.7 26.805,26.7 30.5,23.005 v1(30.5,17.6) ; 27,-0.3 27.1,-0.2 R1_2.1@27.1,6.85 ; U1_3.1@31.1,6.065 31.1,5.775 30.85,5.525 v2(29.7,5.525) 29.75,5.525 30.073,5.202 30.3,4.975 30.3,0.149 30.449,0 v1@31.8,0 ; R1_3.1@34.6,6.85 34.6,0.6 35.218,-0.018 35.218,-0.377 35.741,-0.9 C18.2@36.1,-0.9
  Top Layer w0.508: J1.2@-19.05,-7 J1.4@-19.05,-5 J1.6@-19.05,-3 ; J2.2@-19.05,23 J2.4@-19.05,25 J2.6@-19.05,27 ; J3.1@-7,-14.63 J3.3@-5,-14.63 J3.5@-3,-14.63 ; J4.1@23,-14.63 J4.3@25,-14.63 J4.5@27,-14.63
  Bottom Layer w0.254: J1.6@-19.05,-3 -19.05,-0.975 C10.2@-18.775,-0.7 ; J2.2@-19.05,23 -18.998,22.948 -18.998,21.023 C16.1@-18.769,20.794 ; C12.2@-9.2,-14.575 -7.055,-14.575 cw(c-7.055,-14.63) J3.1@-7,-14.63 ; C1_1.2@14.65,5.525 v2(14.7,5.525) C1_1.2@14.675,5.5 ; C14.1@20.853,-14.422 21.061,-14.63 J4.1@23,-14.63 ; v1(30.5,17.6) 30.5,13.1 P5.2@37.4,6.2
  Bottom Layer w0.712: C16.1@-18.769,20.844 -18.769,20.794 C16.1@-18.675,20.7 ; C12.2@-9.2,-14.575 C12.2@-9.106,-14.669 ; C14.1@20.806,-14.469 20.853,-14.422 C14.1@20.9,-14.375 ; P5.2@37.4,6.2 37.4,6.041 37.631,5.81 37.631,4.794 C26.1@37.725,4.7
  other v1: 15.3,-0.9 16.8,-0.9 35.5,-0.9 36.6,-0.9 18.9,-0.8 20.3,-0.8 25.3,-0.8 26.7,-0.8 31.7,-0.8 33.1,-0.8 18.9,0.1 20.3,0.1 25.3,0.1 26.7,0.1 31.7,0.1 33.1,0.1 35.8,1.9 36.9,1.9 35.8,3 36.9,3 35.8,4.1 36.9,4.1 35.8,5.1 36.9,5.1 -13.4,23 -12.4,23 -13.4,24 -12.4,24
pads on no net: P4.6 U1_1.2 U1_2.2 U1_3.2 U5.2 U5.3 U5.4 U5.5 U5.6 U5.7 U5.14 U5.15 U5.16 U5.17 U5.19 U5.21 U5.22 U6.1 U6.4 U6.5 U6.6 U6.8 U6.11 U6.12 U6.24 U6.27 U6.36 U6.37 U6.39 U6.40 U6.42 U6.45 U6.47 U6.48 U6.52 U6.55 U6.58 U6.59

## Polygon pours and split planes (outlines as drawn)
GND on Top Layer "NONET_L02_P-001" (solid, remove dead copper, pour order 65): -20.2,-16.84 -20.2,45 45,45 45,-16.84
VBAT on Top Layer "Top Layer-No Net" (solid, pour order 25): 14.6,-2.7 37.5,-2.7 37.5,1.1 38.3,1.9 38.3,14 33.8,14 33.8,10.6 35.1,9.3 35.1,3.9 32.3,1.1 15.9,1.1 14.6,-0.2
3V3 on Top Layer "NONET_L02_P-001" (solid, pour order 63): -8.2,22 -2,22 -0.6,20.6 -0.6,18.2 -3.3,15.5 -7.8,15.5 -7.8,18.112 -8.2,18.512
I_SENSE3 on Top Layer "NONET_L02_P-001" (solid, pour order 29): 31.2,-8.2 31.2,-10.4 33,-10.4 33,-8.2
I_SENSE2 on Top Layer "NONET_L02_P-001" (solid, pour order 26): 24.8,-8.2 24.8,-10.4 26.6,-10.4 26.6,-8.2
I_SENSE1 on Top Layer "NONET_L02_P-001" (solid, pour order 32): 18.4,-8.2 18.4,-10.4 20.2,-10.4 20.2,-8.2
Bridge_Out2 on Top Layer "NONET_L02_P-001" (solid, pour order 44): 24.27,-7.6 24.27,-1.925 27.73,-1.925 27.73,-7.6
Bridge_Out1 on Top Layer "NONET_L02_P-001" (solid, pour order 52): 17.87,-7.6 17.87,-1.9 21.33,-1.9 21.33,-7.6
Bridge_Out3 on Top Layer "NONET_L02_P-001" (solid, pour order 45): 30.67,-7.6 30.67,-1.9 34.13,-1.9 34.13,-7.6
VBAT on Top Layer "NONET_L02_P-001" (solid, remove dead copper, pour order 56): -13.9,18.4 -13.1,17.6 -11.9,17.6 -11.9,24.5 -13.9,24.5
GND on Bottom Layer "NONET_L02_P-001" (solid, remove dead copper, pour order 55): -20.2,-16.84 -20.2,45 45,45 45,-16.84
VBAT on Bottom Layer "Bottom Layer-VBAT" (solid, pour order 38): -20.3,-11.2 -20.3,-16.84 32.913,-16.84 38.5,-11.319 38.5,10.4 34.7,10.4 34.7,-7.7 32.9,-9.5 -14.4,-9.5 -14.4,22.5 -11.9,22.5 -11.9,24.5 -14.4,24.5 -14.4,28.5 -20.3,28.5
GND on Layer 1 "NONET_L02_P-001" (solid, pour order 66): -20.2,-16.84 -20.2,45 45,45 45,-16.84
VBAT on Layer 2 "Layer 2-VBAT" (solid, pour order 70): -20.2,-16.84 45,-16.84 45,9.5 34.7,9.5 34.7,1.7 14.4,1.7 14.4,-10.9 -14.9,-10.9 -14.9,22.3 -11.731,22.3 -11.731,24.6 -14.9,24.6 -14.9,28.6 -20.2,28.6
3V3 on Layer 2 "NONET_L02_P-001" (solid, remove dead copper, pour order 71): -20.2,45 45,45 45,-16.84 -20.2,-16.84

## Silkscreen, mask and mechanical layers (free items; w line width, h text height)
Top Overlay:
  circle w0.712: c-2.2,34.6 r0.3
  circle w0.5: c0,0 r13
  circle w1.15: c0,-9.5 r2.1
  circle w1.15: c8,0 r2.1
  circle w1.15: c-8,0 r2.1
  circle w1.15: c0,9.5 r2.1
  lines w0.254: -20.532,19.037 cw(c0,0) 22.208,-17.053
  lines w0.3: -20.382,32.071 cw(c0,0) 33.988,-16.994
  text "SDA" at 24.647,39.653 h0.8 r90
  text "SCL" at 22.747,39.553 h0.8 r90
  text "GND" at 26.747,39.553 h0.8 r90
  text "3V3" at 28.747,39.553 h0.8 r90
  text "GND" at -6.753,33.453 h0.8 r90
  text "3V3" at -4.253,33.453 h0.8 r90
  text "DIN" at -8.453,27.753 h0.8 r90
  text "GND" at -10.653,27.653 h0.8 r90
  text "OUT" at -6.353,27.653 h0.8 r90
  text "3V3" at 0.9,19.5 h1
  text "_" at 39.55,3.5 h1.5
  text "+" at 36.05,2.6 h1.5
Bottom Overlay:
  circle w0.5: c0,0 r13
  lines w0.3: -20.387,19.193 cw(c0,0) 22.231,-17.023 ; -20.356,32.088 cw(c0,0) 33.968,-17.034 ; 5.6,27.5 -6.4,27.5 -6.4,30.5 5.6,30.5 ; 6.1,23.5 10.6,23.5 ; 6.1,25.9 10.6,25.9 ; 6.1,32.1 10.6,32.1 ; 6.1,34.5 10.6,34.5 ; 11.1,23.5 14.1,23.5 ; 11.1,25.9 14.1,25.9 ; 11.1,32.1 14.1,32.1 ; 11.1,34.5 14.1,34.5 ; 14.1,23 29.1,23 29.1,25.5 ; 14.1,23 14.1,35 ; 14.1,23 14.1,25.5 29.1,25.5 ; 14.1,35 29.1,35 29.1,32.5 ; 14.1,35 14.1,32.5 29.1,32.5 ; 29.1,25.5 29.1,32.5 ; 5.6,23 5.6,35 6.1,35 6.1,23 5.6,23 ; 10.6,23 10.6,35 11.1,35 11.1,23 10.6,23
Top Solder:
  circle w1.2: c15,38 r2.1
  circle w1.2: c-15,38 r2.1
Bottom Solder:
  circle w1.2: c15,38 r2.1
  circle w1.2: c-15,38 r2.1
Board Outline:
  lines w0.2: -11.805,8.42 cw(c0,0) -8.42,11.805 -6.571,9.741 ccw(c0,0) -9.741,6.571 -11.805,8.42
  lines w0.254: -10.514,7.646 cw(c0,0) -6.53,11.241 ; -20.2,-16.84 -20.2,45 31.311,45 cw(c26,26) 45,31.311 45,-16.84 -20.2,-16.84